# Altium PCB PCB1.PcbDoc
Units mil, origin at the board's own origin, x right, y up, seen from the top; angles counter-clockwise.
Board outline 2700 x 1000 mil, 2 copper layers (Top Layer, Bottom Layer); 64 components, 73 nets, 299 pads, 89 vias.
Unrouted connection lines stored in the file: 30.
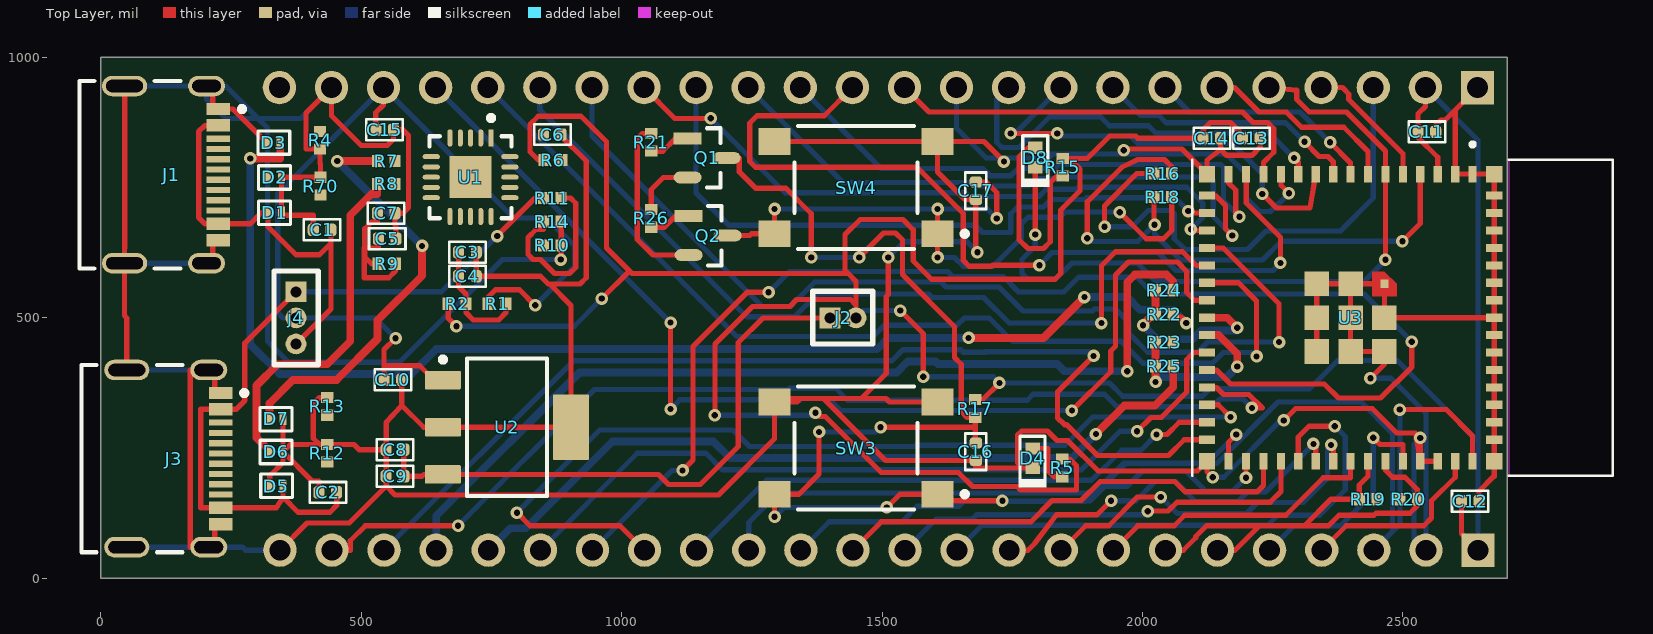
[diagram p0: Top Layer view]
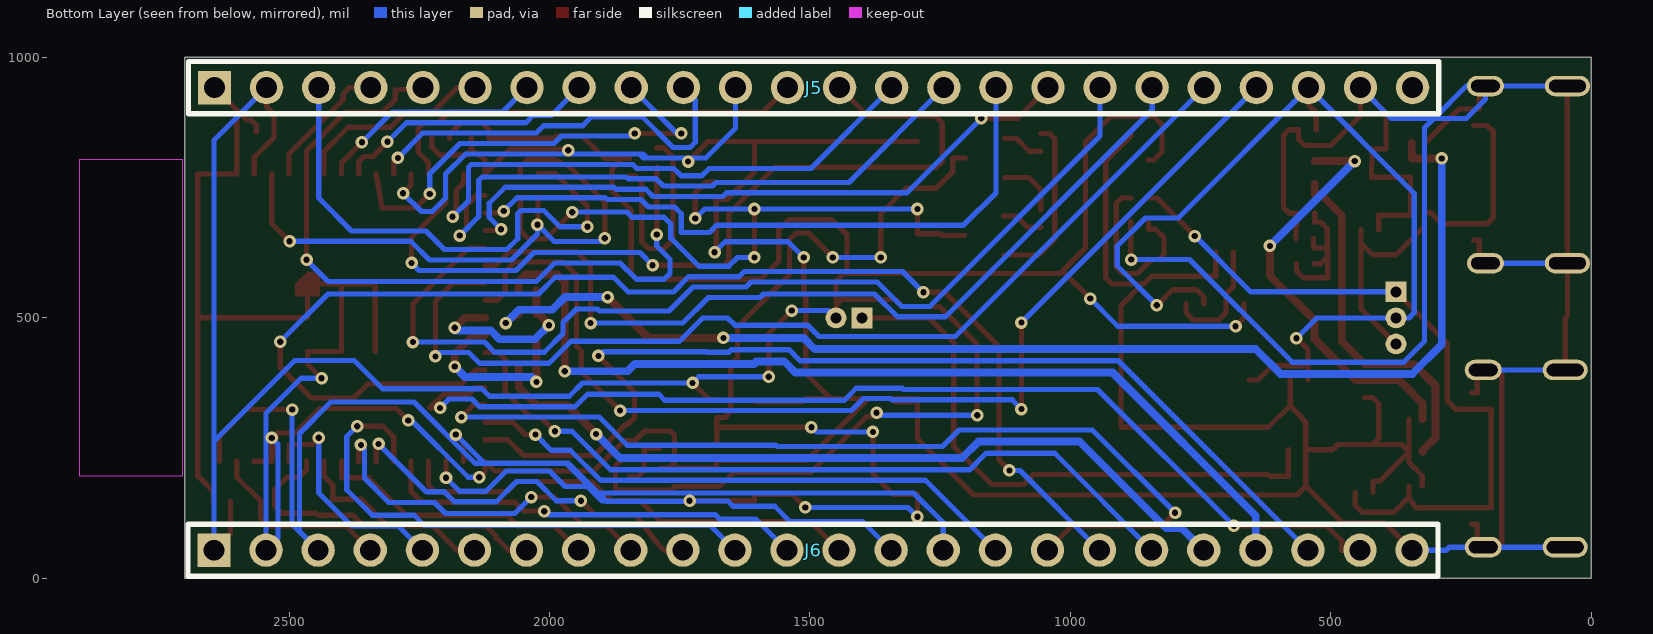
[diagram p1: Bottom Layer view, seen from below]

## Layer stack, top to bottom
Top Solder: solder mask 0.4, Solder Resist, Dk 3.5
Top Layer: signal copper 1.4
Dielectric 1: dielectric 12.6, FR-4, Dk 4.8
Bottom Layer: signal copper 1.4
Bottom Solder: solder mask 0.4, Solder Resist, Dk 3.5

## Board outline
0,1000 2700,1000 2700,0 0,0

## Design rules (kind name [scope] priority, off if disabled: settings)
Clearance [All] p1: gap=10 ignorepadtopadclearanceinfootprint=FALSE except(6: SMDPad-SMDPad)
ComponentClearance R25_23 [InComponent('R25') vs InComponent('R23')] p1: gap=0 collisioncheckmode=3 verticalgap=0 showdistances=FALSE
ComponentClearance R24_22 [InComponent('R24') vs InComponent('R22')] p2: gap=0 collisioncheckmode=3 verticalgap=0 showdistances=FALSE
ComponentClearance R1_2 [InComponent('R1') vs InComponent('R2')] p3: gap=0 collisioncheckmode=3 verticalgap=0 showdistances=FALSE
ComponentClearance [All] p4: gap=10 collisioncheckmode=3 verticalgap=10 showdistances=FALSE
DiffPairsRouting [All] p1: maxlimit=10 minlimit=10 mostfreqgap=10 toplayer_minwidth=15 toplayer_maxwidth=15 toplayer_prefwidth=15 bottomlayer_minwidth=15 bottomlayer_maxwidth=15 bottomlayer_prefwidth=15 maxuncoupledlength=500
PolygonConnect [All] p1: connectstyle=Relief reliefconductorwidth=10 reliefentries=4 polygonreliefangle="90 Angle" airgapwidth=10
RoutingVias [All] p1: holewidth=12 width=24 viastyle="Through Hole" minholewidth=12 minwidth=24 maxholewidth=12 maxwidth=24
SolderMaskExpansion [All] p1: expansion=2 istentingtop=FALSE
Width [All] p1: maxlimit=10 minlimit=10 preferedwidth=10
28 further rules are at their usual default settings.

## Classes and differential pairs
differential pair FTDI_USB: +FTDI_USB_P -FTDI_USB_N
differential pair ESP_USB: +ESP_USB_P -ESP_USB_N
differential pair CON_ESP_USB: +CON_ESP_USB_P -CON_ESP_USB_N
differential pair CON2_USB: +CON2_USB_P -CON2_USB_N
differential pair CON1_USB: +CON1_USB_P -CON1_USB_N

## Components (designator, comment, footprint, x,y, rotation, side; value= is the part's Value field where it differs from the comment)
C1 "100nf , 50V" CAPC1005X55N 425,669 r0 top
C2 "100nf , 50V" CAPC1005X55N 436,165.01 r0 top
C3 "4u7,16V" CAPC1005X55N 704.07,626 r180 top
C4 "100nf , 50V" CAPC1005X55N 703.93,580 r0 top
C5 "100nf , 50V" CAPC1005X55N 550,652 r0 top
C6 "100nf , 50V" CAPC1005X55N 867,852 r0 top
C7 "100nf , 50V" CAPC1005X55N 547.93,701 r0 top
C8 "10uf , 10v" CAPC1005X55N 565,247 r0 top
C9 "10uf , 10v" CAPC1005X55N 565,196 r0 top
C10 "4u7,16V" CAPC1005X55N 561,381 r180 top
C11 "100nf , 50V" CAPC1005X55N 2545.93,857 r180 top
C12 "100nf , 50V" CAPC1005X55N 2629,148 r180 top
C13 "10uf , 10v" CAPC1005X55N 2209,845 r180 top
C14 "100nf , 50V" CAPC1005X55N 2133.07,845 r180 top
C15 "100nf , 50V" CAPC1005X55N 545,861 r180 top
C16 "1uF,35V" CAPC1005X55N 1680,243 r90 top
C17 "100nf , 50V" CAPC1005X55N 1680,744 r90 top
D1 "AQ3045-01ETG" AQ3045-01ETG 334,702 r180 top
D2 "AQ3045-01ETG" AQ3045-01ETG 334,770 r180 top
D3 "AQ3045-01ETG" AQ3045-01ETG 331.8,836 r0 top
D4 "LED_GREEN" "LED_0402_GRN - duplicate" 1789,230.7 r90 top
D5 "AQ3045-01ETG" AQ3045-01ETG 337.2,177 r0 top
D6 "AQ3045-01ETG" AQ3045-01ETG 337,243 r180 top
D7 "AQ3045-01ETG" AQ3045-01ETG 337,306 r180 top
D8 "LED_RED" LED_0402_RED 1794,807.7 r90 top
J1 "217179-0001" FP-2171790001-MFG 91,775 r270 top
J2 "FTS-102-01-F-S" HDR_1X2 1400,500 r90 top locked
J3 "217179-0001" FP-2171790001-MFG 95.28,229.92 r270 top
j4 "612-FTS-103-01-F-S-ND" "HDR_1X3 - duplicate" 375,550 r0 top locked
J5 "0022284245" HDR_1X24_2.54MM 1493,942 r90 bottom
J6 "0022284245" HDR_1X24_2.54MM 1494,54 r90 bottom
Q1 "SS8050-G" PCBComponent_1 1164,812 r0 top
Q2 "SS8050-G" PCBComponent_1 1166,663 r0 top
R1 "0R" RESC1005X37N 761,527 r0 top
R2 "0R" RESC1005X37N 683.99,527 r0 top
R4 "5k1" RESC1005X37N 421,841 r90 top
R5 "1k_R" RESC1005X37N 1846,212 r90 top
R6 "0R" RESC1005X37N 868,803 r0 top
R7 "27R" RESC1005X37N 548,801 r0 top
R8 "27R" RESC1005X37N 548,757 r0 top
R9 "0R" RESC1005X37N 549.01,604 r0 top
R10 "10K" RESC1005X37N 867,639 r180 top
R11 "4k7" RESC1005X37N 867,730 r180 top
R12 "5k1" RESC1005X37N 435,240.01 r270 top
R13 "5k1" RESC1005X37N 435,330.01 r270 top
R14 "10K" RESC1005X37N 867,685 r180 top
R15 "1k_R" RESC1005X37N 1847,789 r90 top
R16 "27R" RESC1005X37N 2039.01,777 r0 top
R17 "10K" RESC1005X37N 1679,326 r90 top
R18 "27R" RESC1005X37N 2039,732 r180 top
R19 "0R" RESC1005X37N 2432.99,152 r180 top
R20 "0R" RESC1005X37N 2511,152 r180 top
R21 "10K" RESC1005X37N 1057,837 r90 top
R22 "0R" RESC1005X37N 2042,507 r180 top
R23 "0R" RESC1005X37N 2042.02,453 r180 top
R24 "0R" RESC1005X37N 2041.99,553 r180 top
R25 "0R" RESC1005X37N 2042.01,407 r180 top
R26 "10K" RESC1005X37N 1057,691 r90 top
R70 "5k1" RESC1005X37N 422,753 r270 top
SW3 "PTS645SH50SMTR92LFS" FP-PTS645SH50SMTR92LFS-MFG 1450,250 r180 top locked
SW4 "PTS645SH50SMTR92LFS" FP-PTS645SH50SMTR92LFS-MFG 1450,750 r180 top locked
U1 "FT231XQ-R" FP-QFN-20-IPC_B 710,770 r270 top locked
U2 "TL1963A-33DCYR" DCY0004A_N 780,290 r0 top locked
U3 "ESP32-S3-MINI-1-N8" XCVR_ESP32-S3-MINI-1-N8 2399.41,500.39 r270 top locked

## Footprints (in the part's own frame and the unit in brackets; to place one, negate y for a bottom-side part, rotate by r counter-clockwise, add the part's x,y. Pads: shape width x height; smd on the part's side, far side on the other; paste and mask are expansions set on the pad)
AQ3045-01ETG [mm]
  rect 0.35x0.6 smd: 1(-0.325,0) 2(0.325,0)
  silkscreen extent -0.76,-0.56 0.79,0.58, body extent -0.54,-0.34 0.54,0.34, height 0.42
CAPC1005X55N [mm]
  rrect53% 0.54x0.6 smd: 1(-0.43,0) 2(0.43,0)
  silkscreen extent -0.89,-0.51 0.89,0.51, body extent -0.5,-0.25 0.5,0.25, height 0.55
DCY0004A_N [mm] "SOT223, 4-Leads, Body 6.7x3.7mm, Pitch 2.3mm, IPC Medium Density"
  rrect11% 1.75x0.9 smd: 1(-3.125,2.3) 2(-3.125,0) 3(-3.125,-2.3)
  rrect6% 1.75x3.2 smd: 4(3.125,0)
  silkscreen extent -3.25,-3.35 1.95,3.42, body extent -3.5,-3.25 3.5,3.25, height 1.62
FP-2171790001-MFG [mm]
  rect 0.6x1.15 smd paste+0 mask+0: A1B12(-3.2,3.425) A4B9(-2.4,3.425) B1A12(3.2,3.425) B4A9(2.4,3.425)
  rect 0.3x1.15 smd paste+0 mask+0: A5(-1.25,3.425) A6(-0.25,3.425) A7(0.25,3.425) A8(1.25,3.425) B5(1.75,3.425) B6(0.75,3.425) B7(-0.75,3.425) B8(-1.75,3.425)
  rrect100% 1x1.8 hole 1.4 slot 0.6 at 0 deg paste-2539.97 mask+0: S1(-4.32,2.85) S2(4.32,2.85)
  rrect100% 1x2.2 hole 1.8 slot 0.6 at 0 deg paste-2539.97 mask+0: S3(-4.32,-1.15) S4(4.32,-1.15)
  silkscreen extent -4.57,-3.35 4.57,4.7, body extent -4.92,-3.45 4.92,4.1, height 0.25
FP-PTS645SH50SMTR92LFS-MFG [mm]
  rect 1.55x1.3 smd paste+0 mask+0: 1(-3.975,2.25) 2(3.975,2.25) 3(-3.975,-2.25) 4(3.975,-2.25)
  silkscreen extent -5.43,-3 3,3, body extent -4.5,-3 4.5,3, height 4.3
FP-QFN-20-IPC_B [mm]
  rect 0.84x0.242 smd paste+0 mask+0: 1(-1.916,1)
  rrect100% 0.84x0.242 smd paste+0 mask+0: 2(-1.916,0.5) 3(-1.916,0) 4(-1.916,-0.5) 5(-1.916,-1) 11(1.916,-1) 12(1.916,-0.5) 13(1.916,0) 14(1.916,0.5) 15(1.916,1)
  rrect100% 0.242x0.84 smd paste+0 mask+0: 6(-1,-1.916) 7(-0.5,-1.916) 8(0,-1.916) 9(0.5,-1.916) 10(1,-1.916) 16(1,1.916) 17(0.5,1.916) 18(0,1.916) 19(-0.5,1.916) 20(-1,1.916)
  rect 2.05x2.05 smd paste-1000 mask+0: 21(0,0)
  silkscreen extent -3.01,-2 2,2, body extent -2.59,-2.59 2.59,2.59, height 0.25
HDR_1X2 [mil]
  rect 40x40 hole 21: 1(0,0)
  round 40 hole 21: 2(0,-50)
  silkscreen extent -50,-82 51,33, body extent -43,-74 42,26, height 154
"HDR_1X3 - duplicate" [mil]
  rect 40x40 hole 21: 1(0,0)
  round 40 hole 21: 2(0,-50) 3(0,-100)
  silkscreen extent -42,-140 42,40, body extent -42,-125 42,25, height 154
HDR_1X24_2.54MM [mil]
  rect 64x64 hole 40: 1(0,1150)
  round 64 hole 40: 2(0,1050) 3(0,950) 4(0,850) 5(0,750) 6(0,650) 7(0,550) 8(0,450) 9(0,350) 10(0,250) 11(0,150) 12(0,50) 13(0,-50) 14(0,-150) 15(0,-250) 16(0,-350) 17(0,-450) 18(0,-550) 19(0,-650) 20(0,-750) 21(0,-850) 22(0,-950) 23(0,-1050) 24(0,-1150)
  silkscreen extent -50,-1200 50,1200, body extent -47,-1205 51,1195, height 376
"LED_0402_GRN - duplicate" [mm]
  rect 0.6x0.7 smd: 1(-0.475,0) 2(0.475,0)
  silkscreen extent -1.42,-0.69 1.07,0.69, body extent -0.5,-0.3 0.5,0.3, height 0.2
LED_0402_RED [mm]
  rect 0.6x0.7 smd: 1(-0.475,0) 2(0.475,0)
  silkscreen extent -1.42,-0.69 1.07,0.69, body extent -0.5,-0.3 0.5,0.3, height 0.2
PCBComponent_1 [mil]
  rect 53.43x22.52 smd paste+0 mask+0: 1(-37.42,32.4)
  rrect100% 53.43x22.52 smd paste+0 mask+0: 2(-37.42,-42.4) 3(37.42,-5)
  silkscreen extent 0,-62 26,52, body extent -74,-72 74,62, height 10
RESC1005X37N [mm]
  rect 0.54x0.6 smd: 1(-0.432,0) 2(0.432,0)
  body extent -0.5,-0.25 0.5,0.25, height 0.37
XCVR_ESP32-S3-MINI-1-N8 [mm]
  rect 0.8x0.4 smd: 1(-7,5.95) 2(-7,5.1) 3(-7,4.25) 4(-7,3.4) 5(-7,2.55) 6(-7,1.7) 7(-7,0.85) 8(-7,0) 9(-7,-0.85) 10(-7,-1.7) 11(-7,-2.55) 12(-7,-3.4) 13(-7,-4.25) 14(-7,-5.1) 15(-7,-5.95) 31(7,-5.95) 32(7,-5.1) 33(7,-4.25) 34(7,-3.4) 35(7,-2.55) 36(7,-1.7) 37(7,-0.85) 38(7,0) 39(7,0.85) 40(7,1.7) 41(7,2.55) 42(7,3.4) 43(7,4.25) 44(7,5.1) 45(7,5.95)
  rect 0.4x0.8 smd: 16(-5.95,-7) 17(-5.1,-7) 18(-4.25,-7) 19(-3.4,-7) 20(-2.55,-7) 21(-1.7,-7) 22(-0.85,-7) 23(0,-7) 24(0.85,-7) 25(1.7,-7) 26(2.55,-7) 27(3.4,-7) 28(4.25,-7) 29(5.1,-7) 30(5.95,-7) 46(5.95,7) 47(5.1,7) 48(4.25,7) 49(3.4,7) 50(2.55,7) 51(1.7,7) 52(0.85,7) 53(0,7) 54(-0.85,7) 55(-1.7,7) 56(-2.55,7) 57(-3.4,7) 58(-4.25,7) 59(-5.1,7) 60(-5.95,7)
  rect 0.4x0.4 smd paste-1 mask+0: 61(-1.65,1.65)
  rect 0.8x0.8 smd: 62(-7,7) 63(-7,-7) 64(7,-7) 65(7,7)
  rect 1.2x1.2 smd: 66(0,1.65) 67(1.65,1.65) 68(-1.65,0) 69(0,0) 70(1.65,0) 71(-1.65,-1.65) 72(0,-1.65) 73(1.65,-1.65)
  Top Layer region: -1.05,1.05 -2.25,1.05 -2.25,1.65 -1.65,2.25 -1.05,2.25
  Keep-Out Layer region: 7.7,7.725 -7.7,7.725 -7.7,12.775 7.7,12.775
  Keep-Out Layer region: 7.7,7.725 -7.7,7.725 -7.7,12.775 7.7,12.775
  silkscreen extent -8.55,-7.72 7.7,12.77, body extent -7.7,-7.73 7.7,12.78, height 2.55

## Part data
C1 C2 C4 C5 C6 C7 C11 C12 C14 C15 C17: library part CL05B104KB5NNNC, "Ceramic Capacitor, Multilayer, Ceramic, 50V, 10% +Tol, 10% -Tol, X7R, 15% TC, 0.1uF, Surface Mount, 0402"
C3 C10: library part CL05A475MO5NUNC, "Multilayer Ceramic Capacitor, 4.7 uF, 16 V, ± 20%, X5R, 0402 [1005 Metric]"
C8 C9 C13: library part CL05A106MP8NUB8, "Multilayer Ceramic Capacitor, 10 uF, 10 V, ± 20%, X5R, 0402 [1005 Metric]"
C16: library part CL05A105KL5NRNC, "Ceramic Capacitor, Multilayer, Ceramic, 35V, 10% +Tol, 10% -Tol, X5R, 15% TC, 1uF, Surface Mount, 0402"
D1 D2 D3 D5 D6 D7: "TVS DIODE 12VC 3A SOD882 / ESD Suppressor TVS Bi-Dir 5.3V Automotive 2-Pin SOD-882 T/R"
D4: library part VLMG1500-GS08, "LED Uni-Color Yellow Green 574nm 2-Pin Chip 0402(1006Metric) T/R"
D8: library part VLMS1500-GS08, "LED Uni-Color Super Red 639nm 2-Pin Chip 0402(1006Metric) T/R"
J1 J3: "USB Connector, 16 Contact(s), Female, Right Angle, Surface Mount Terminal, Locking, Receptacle"
J2: "Conn Unshrouded Header HDR 2 POS 1.27mm Solder ST Top Entry Thru-Hole Layer"
j4: library part FTS-103-01-F-S, "Conn Unshrouded Header HDR 3 POS 1.27mm Solder ST Thru-Hole"
J5 J6: "Conn Unshrouded Header HDR 24 POS 2.54mm Solder ST Top Entry Thru-Hole KK® Bag"
Q1 Q2: "Trans Gp Bjt NPN 25V 1.5A 300MW 3-PIN SOT-23 T/r"
R1 R2 R6 R9 R19 R20 R22 R23 R24 R25: library part RC0402J000CS, "RC Series 0402 0 Ohms 0.03 W Jumper Surface Mount Thick Film Chip Resistor"
R4 R12 R13 R70: library part AC0402FR-075K1L, "SMD Chip Resistor, 5.1 kOhm, ± 1%, 63 mW, 0402 [1005 Metric], Thick Film, General Purpose"
R5 R15: library part RCS1005F102CS, "Res Thick Film 0402 1K Ohm 1% 1/16W ±100ppm/°C Molded SMD Punched Paper T/R"
R7 R8 R16 R18: library part RC0402FR-0727RL, "SMD Chip Resistor, 27 Ohm, ï¿½ 1%, 62.5 mW, 0402 [1005 Metric], Thick Film, General Purpose"
R10 R14 R17 R21 R26: library part AC0402FR-0710KL, "SMD Chip Resistor, 10 kOhm, ï¿½ 1%, 62.5 mW, 0402 [1005 Metric], Thick Film, General Purpose"
R11: library part RC0402FR-074K7L, "SMD Chip Resistor, 4.7 kOhm, ï¿½ 1%, 62.5 mW, 0402 [1005 Metric], Thick Film, General Purpose"
SW3 SW4: "Switch Tactile N.O. SPST Round Button Gull Wing 0.05A 12VDC 100000Cycles 1.96N SMD T/R"
U1: "USB to Full Handshake UART Interface QFN20 Reel (not offered in your region)"
U2: "LDO Regulator Pos 3.3V 1.5A 4-Pin(3+Tab) SOT-223 T/R"
U3: "SMD module, ESP32-S3FN8, 8 MB SPI flash, PCB antenna"

## Via types
v1: diameter 24, hole 12, Top Layer to Bottom Layer, 89 vias

## Nets (pads, with @x,y where several pads share a name; then routed paths per layer and width w, separated by ;. In a path a pad name is that pad's centre, name@x,y a point inside that pad or via, vN(x,y) a via of type N, cw(c..) or ccw(c..) an arc to the next point about the centre after c; other vN are vias at no path point)
+3V3: C11.2 C12.2 C13.2 C14.2 J2.2 J5.2 J6.1 R2.1 R5.2 R6.1 R15.2 R17.2 U3.3 | length 6680.1
  Top Layer w10: R2.1 666.98,500 v1(682.98,484) ; R6.1 840,803 824,819 824,871 840,887 922,887 971,838 971,634 1015,590 ; v1(962,537) 1015,590 ; v1(1179,313) 1179,450 1251,522 1323,522 1336,535 1440,535 1450,525 ; v1(1372,318) 1379.35,310.65 1390.79,310.65 1498.44,203 1646.36,203 1673.36,176 1759.39,176 1766.03,169.36 1873,169.36 1873,216 1859.99,229.01 R5.2 ; J2.2 1450,525 ; v1(1535,514) 1579,470 v1(1579,387) ; R17.2 1693.33,343.01 v1(1725.32,375) ; R15.2 1860,806.01 ; C13.2 2192.07,851.81 2168.88,875 2130,875 2116.14,861.14 C14.2 1991,845 1987,849 1937,849 1894.01,806.01 1860,806.01 ; J5.2 2543,906 2529,892 C11.2 2529,846 2566.73,808.27 U3.3 ; C12.2 2612.07,85.93 J6.1 ; 1015,590 1020,585 1435,585 ; 1435,585 1450,570 1450,525 ; 1435,585 1429,591 1429,660 1458,689 1540,689 1560,669 1560,609 1595,574 1832,574 1843,585 1843,707.01 1880,744.01 1880,786.01 1860,806.01
  Bottom Layer w10: v1(682.98,484) 909,484 v1(962,537) ; v1(1179,313) 1367,313 v1(1372,318) ; J2.2 1464,514 v1(1535,514) ; v1(1579,387) 1713.32,387 v1(1725.32,375) 1936.42,375 1961.92,349.49 2114.99,349.49 2129.49,364 2320.68,364 2374.68,418 2489,418 2644,263 ; J5.2 2644,841 2644,263 ; J6.1 2644,263
+3V3_FTDI: C6.1 C7.1 R6.2 R9.1 U1.10 U1.20 | length 130.8
  Top Layer w10: C7.1 531,684 520,684 507,671 507,617 520,604 R9.1
+3V3_REG: C8.2 C9.2 J2.1 U2.3 | length 1128.2
  Top Layer w10: C8.2 C9.2 617,196 620.45,199.45 U2.3 1070.55,199.45 1090,180 1151,180 1224,253 1224,452.84 1271.16,500 J2.1
+5: C10.2 C15.2 j4.2 J5.22 R1.1 U2.1 | length 1822.6
  Top Layer w10: C15.2 528.07,894 543,908.93 J5.22 ; C10.2 544.07,408 ; v1(566,461) 544.07,439.07 544.07,408 ; U2.1 640,380.55 612.55,408 544.07,408 ; R1.1 743.99,540 757.99,554 804,554 v1(834,524)
  Bottom Layer w10: v1(566,461) 527,500 j4.2 350,500 340,510 340,739 J5.22 793,692 856,692 910,638 910,600 v1(834,524)
"+5V VBUS1": C2.2 D5.2 J3.A4B9 J3.B4A9 j4.1 R11.2 | length 1415.5
  Top Layer w10: D5.2 350,156 ; j4.1 276.7,451.7 276.7,341.11 260,324.41 J3.A4B9 192,324.41 192,135.43 J3.B4A9 337,135.43 350,156 ; C2.2 452.93,139.93 440,127 379,127 350,156 ; v1(761,657) 834,730 R11.2
  Bottom Layer w10: j4.1 654,550 v1(761,657)
"+5V VBUS2": C1.2 D1.2 J1.A4B9 J1.B4A9 j4.3 | length 780.7
  Top Layer w10: J1.A4B9 200,869.49 188,857.49 188,692.51 200,680.51 J1.B4A9 287,680.51 308.49,702 D1.2 321.2,675 375,621.2 420,621.2 441.93,643.13 ; j4.3 441.93,516.93 441.93,643.13 ; C1.2 441.93,643.13
+VCC_FTDI: C3.2 C4.1 R1.2 R2.2 U1.12 | length 227.5
  Top Layer w10: C3.2 687.14,602.14 687,602 C4.1 687,560 701,546 R2.2 701,510 715,496 764.01,496 778.01,510 R1.2
"BTN GPIO0": C17.2 Q2.3 R18.1 SW4.1 SW4.2 | length 1371.4
  Top Layer w10: Q2.3 1246,658 1249.42,661.42 SW4.2 v1(1293.5,709) ; v1(1606.5,616) SW4.1 v1(1606.5,709) ; C17.2 1700,760.93 1720,740.93 v1(1720,691) ; v1(1956.08,703) 2007.08,652 2040,652 2056.01,668.01 R18.1
  Bottom Layer w10: v1(1293.5,709) v1(1606.5,709) 1702,709 v1(1720,691) ; v1(1606.5,616) 1639,616 1656,599 1713,599 1767,653 1767,680 1780,693 1841.25,693 1851.25,703 v1(1956.08,703)
CHIP_PU: C16.2 J6.3 Q1.3 R17.1 SW3.1 SW3.2 U3.45 | length 3503.6
  Top Layer w10: Q1.3 1226,807 1226,780 1257,749 1315,749 1364,700 v1(1364,616) ; v1(1293.5,118) SW3.2 1340.42,161.42 1379,200 v1(1379,281) ; v1(1456,616) 1503,663 1526,663 1539,650 1539,583 1639,483 1639,424 1652.01,410.99 1652.01,320 1663.02,308.99 R17.1 1679,290 ; v1(1497,290) 1679,290 ; v1(1509,136) 1534.42,161.42 SW3.1 1606.5,149 v1(1731,149) ; C16.2 1679,259.93 1679,290 ; v1(2494,324) 2583,324 2633.66,273.34 U3.45
  Bottom Layer w10: v1(1293.5,118) 1311.5,136 v1(1509,136) ; v1(1364,616) v1(1456,616) ; v1(1379,281) 1488,281 v1(1497,290) ; v1(1731,149) 1732,148 1890.29,148 1963.34,221.06 2142.8,221.06 2260,338.26 2419.74,338.26 2480,278 2480,90 ; J6.3 2480,90 ; v1(2494,324) 2494,104 2480,90
CON1_USB_N: D7.2 J3.A7 J3.B7 R7.1 | length 809.9
  Top Layer w15: D7.2 324.2,336 369.2,381 453,381 531.31,459.31 531.31,495.47 617,581.15 v1(617,638) ; v1(454,801) R7.1
  Bottom Layer w15: v1(454,801) v1(617,638)
CON1_USB_P: D6.2 J3.A6 J3.B6 R8.1 | length 682.5
  Top Layer w15: D6.2 324.2,245 299.2,270 299.2,370.2 340,411 435,411 479,455 479,697 520,738 530.99,738 R8.1
CON2_USB_N: D3.2 J1.A7 J1.B7 R22.1 | length 2377.3
  Top Layer w15: v1(287,806) 344.59,806 D3.2 ; v1(1666,461.5) 1809.9,461.5 v1(1888.44,540.04) ; R22.1 2077.23,496.77 v1(2084,490)
  Bottom Layer w15: v1(287,806) 287,449 343.5,392.5 596.5,392.5 644,440 1490.46,440 1511.96,461.5 v1(1666,461.5) ; v1(1888.44,540.04) 1970.21,540.04 1994.76,515.5 2058.5,515.5 v1(2084,490)
CON2_USB_P: D2.2 J1.A6 J1.B6 R23.1
"CON GPIO0": J5.3 R16.1 | length 1001.7
  Top Layer w10: v1(1927,675) 1927,715 1989,777 R16.1
  Bottom Layer w10: v1(1927,675) 1980,675 2011,706 2055,706 2061,700 2061,652 2082,631 2201.29,631 2237.29,667 2380,667 2443,730 J5.3
CON_ESP_USB_N: J6.21 R24.1 | length 1811
  Top Layer w15: v1(1970.5,397.5) 1970.5,568.5 1985,583 2046,583 2059,570 R24.1
  Bottom Layer w15: J6.21 644,119.86 919.14,395 1528,395 1549.5,416.5 1602.5,416.5 1607.5,411.5 1836.06,411.5 1850.06,397.5 v1(1970.5,397.5)
CON_ESP_USB_P: J6.20 R25.1 | length 1510.9
  Top Layer w15: v1(1910.5,277) 1965,331.5 2023.39,331.5 2059.02,367.12 R25.1
  Bottom Layer w15: J6.20 786.09,96.09 815.91,96.09 982.32,262.5 1176.5,262.5 1208.25,230.75 1864.25,230.75 v1(1910.5,277)
DTR_FTDI: Q2.2 R21.2 U1.18 | length 335.6
  Top Layer w10: R21.2 1040,854.01 1030,844.01 1030,650.6 1060,620.6 Q2.2
ESP_USB_N: R22.2 R24.2 U3.23 | length 350.3
  Top Layer w15: v1(2001,486) 2001,488 2020,507 R22.2 2024.99,529 R24.2 ; U3.23 2162.61,500.39 v1(2182,481)
  Bottom Layer w15: v1(2001,486) 2028,459 2096,459 2113,476 2182,476 v1(2182,481)
ESP_USB_P: R23.2 R25.2 U3.24 | length 342.8
  Top Layer w15: v1(2025,376.98) R25.2 2025,429 R23.2 ; U3.24 2146,466.93 2182,430.93 v1(2182,406.5)
  Bottom Layer w15: v1(2025,376.98) 2034.52,386.5 2162,386.5 v1(2182,406.5)
FTDI_USB_N: R7.2 U1.9
FTDI_USB_P: R8.2 U1.8
GND: C1.1 C2.1 C3.1 C4.2 C5.2 C6.2 C7.2 C8.1 C9.1 C10.1 C11.1 C12.1 C13.1 C14.1 C15.1 C16.1 C17.1 D1.1 D2.1 D3.1 D4.1 D5.1 D6.1 D7.1 J1.A1B12 J1.B1A12 J1.S1 J1.S2 J1.S3 J1.S4 J3.A1B12 J3.B1A12 J3.S1 J3.S2 J3.S3 J3.S4 J5.1 J5.23 J6.2 J6.24 R4.1 R10.1 R12.1 R13.1 R14.1 R70.1 SW3.3 SW3.4 SW4.3 SW4.4 U1.3 U1.13 U1.21 U2.2 U2.4 U3.1 U3.2 U3.42 U3.43 U3.46 U3.47 U3.48 U3.49 U3.50 U3.51 U3.52 U3.53 U3.54 U3.55 U3.56 U3.57 U3.58 U3.59 U3.60 U3.61 U3.62 U3.63 U3.64 U3.65 U3.66 U3.67 U3.68 U3.69 U3.70 U3.71 U3.72 U3.73 | length 13884.4
  Top Layer w10: J1.S3 46,945.08 46,634 45.72,633.72 J1.S4 45.72,504.28 50,500 J3.S3 ; J1.S2 215,604.92 215,649.02 J1.B1A12 ; J1.S1 215,945.08 215,900.98 J1.A1B12 254.02,900.98 D3.1 ; J3.B1A12 219,103.94 219,59.84 J3.S2 172,59.84 172,400 J3.S1 219,400 219,355.91 J3.A1B12 ; D5.1 324.41,197 349.8,222.39 D6.1 ; J6.24 396,106 477,106 548.07,177.07 ; D7.1 D6.1 ; C1.1 408.07,697 346.8,697 D1.1 D2.1 384,770 R70.1 422,796 421,797 R4.1 394,823.99 394,893 J5.23 443,888 500,831 550,831 561.93,842.93 C15.1 580,861 591,850 591,712 580,701 C7.2 564.86,677.07 566.93,675 C5.2 ; C2.1 419.07,187 405.8,187 D6.1 ; R13.1 420,347.02 408,335.02 408,269.02 420,257.02 ; C10.1 577.93,332.07 ; C3.1 721,612 720.86,611.86 C4.2 844,580 859,565 862,565 ; v1(883,612) 884.01,613.01 R10.1 R14.1 ; C6.2 883.93,849.07 932,801 932,577 920,565 862,565 ; SW4.4 SW4.3 ; v1(1512,616) 1512,545 1508,541 1508,393 1460,345 ; SW3.3 1514,338.58 1507.58,345 1460,345 ; v1(1683,626) 1680,629 C17.1 1659.43,727.07 1606.5,780 SW4.3 ; v1(1734,800) 1695.42,838.58 SW4.3 ; D4.1 1770,212 ; v1(1964,822) 1966,824 2075.8,824 U3.63 2123.82,802.82 2150,823.18 ; v1(2135,194) 2123.82,205.18 U3.64 2105.01,206 1915,206 1856.24,264.76 1835.65,264.76 1817.42,283 1768,283 1760,275 1760,222 1770,212 ; C14.1 2150,823.18 ; C13.1 2225.93,827.93 2210,812 2161.18,812 2150,823.18 ; v1(2271,303) 2294,326 2441,326 2488,279 2523.73,279 2525.65,268.12 U3.42 ; U3.73 U3.72 U3.71 U3.68 ; v1(2437.41,383.94) 2464.37,410.89 U3.67 U3.70 U3.69 U3.68 ; v1(2533.27,269.46) U3.42 ; C11.1 2562.86,870 2572.86,880 2581,880 2600.2,899.2 ; U3.43 U3.42 ; J5.1 2600.2,899.2 ; C12.1 2645.93,167.06 2675,196.13 U3.65 U3.46 U3.47 U3.48 U3.49 U3.50 U3.51 U3.52 U3.53 ; D6.1 363.81,257.02 420,257.02 ; 420,257.02 R12.1 486,257.02 496.02,247 C8.1 ; 548.07,177.07 548.07,176.93 565,160 1185.71,160 1293.5,267.79 SW3.4 ; 548.07,177.07 C9.1 548.07,221 C8.1 ; C8.1 548.07,299 577.93,332.07 ; 577.93,332.07 620,290 U2.2 U2.4 903.03,523.97 862,565 ; SW3.4 1336.49,338.58 1342.91,345 ; SW3.4 1293.5,345 1342.91,345 ; 1342.91,345 1387.53,345 ; 1387.53,345 1506.46,226.07 C16.1 1680,212 1770,212 ; 1387.53,345 1460,345 ; U3.68 U3.61 U3.66 U3.53 ; 2600.2,899.2 U3.2 U3.1 U3.62 U3.60 U3.59 U3.58 U3.57 U3.56 U3.55 U3.54 U3.53
  Bottom Layer w10: J1.S4 J1.S2 ; J1.S3 J1.S1 ; J3.S4 J3.S2 272,59.84 277.84,54 J6.24 ; J3.S3 J3.S1 ; J5.23 384,883 302.08,883 ; v1(883,612) 771,612 574,415 360,415 320,455 320,865.08 302.08,883 ; v1(1512,616) 1542,646 1663,646 v1(1683,626) ; v1(1734,800) 1741,807 1820,807 1827.67,814.67 1956.67,814.67 v1(1964,822) ; v1(2135,194) 2156,194 2265,303 v1(2271,303) ; v1(2437.41,383.94) 2477.06,383.94 2544,317 J6.2 2521,77 2521,257.2 v1(2533.27,269.46) ; J1.S1 203.2,919.8 240,883 302.08,883 ; J1.S1 240,945.08 302.08,883
GPIO0: R16.2 R18.2 U3.4 | length 1152.6
  Top Layer w10: v1(1894,653) 1894,722.72 1960.31,789.03 1991,804 2042.02,804 2056.02,790 R16.2 ; R18.2 2021.99,680.01 v1(2023,679) ; v1(2499,647) 2533.27,681.27 U3.4
  Bottom Layer w10: v1(1894,653) 1900.24,646.76 1990.76,646.76 v1(2023,679) 2023,661 2073,611 2230.33,611 2266.33,647 v1(2499,647)
GPIO1: J5.4 U3.5 | length 255
  Top Layer w10: J5.4 2384,942 2396,930 2396,919 2499.8,815.2 U3.5
GPIO2: D8.1 J5.5 U3.6 | length 1453.1
  Top Layer w10: v1(1794,660) D8.1 ; J5.5 2296,937 2296,919 2320,895 2391.71,895 2466.34,820.38 U3.6 v1(2466.34,611.34)
  Bottom Layer w10: v1(1794,660) 1794,638 1768.56,612.56 1768.56,585.44 1780,574 1832.79,574 1864.29,605.5 1989.75,605.5 2025.4,569.86 2424.86,569.86 v1(2466.34,611.34)
GPIO3: J5.6 U3.7 | length 384.1
  Top Layer w10: J5.6 2176.53,942 2223.53,895 2276,895 2305.04,865.96 2386.44,865.96 2432.87,819.53 U3.7
GPIO4: J5.7 U3.8 | length 437.8
  Top Layer w10: v1(2360,837) 2399.41,797.59 U3.8
  Bottom Layer w10: J5.7 2090,895 2302,895 v1(2360,837)
GPIO5: J5.8 U3.9 | length 505.8
  Top Layer w10: v1(2311,838) 2339,810 2355.94,810 2365.94,800 U3.9
  Bottom Layer w10: J5.8 1996,889 2031,889 2045.33,874.67 2274.33,874.67 v1(2311,838)
GPIO6: J5.9 U3.10 | length 854.4
  Top Layer w10: v1(1747,854) v1(1836.1,854) ; v1(2230,738) 2257,711 2321.35,711 U3.10
  Bottom Layer w10: v1(1747,854) 1755,854 J5.9 ; v1(1836.1,854) 1841.1,849 1976.67,849 1991,834.67 2171.69,834.67 2230,776.36 v1(2230,738)
GPIO7: J5.10 U3.11 | length 781.2
  Top Layer w10: v1(2291,807) 2299.02,798.98 U3.11
  Bottom Layer w10: J5.10 1720,919 1720,837 1730,827 1763,827 1822,886 1919,886 1936,869 2011,869 2025.33,854.67 2243.33,854.67 v1(2291,807)
GPIO8: J5.11 U3.12 | length 873.7
  Top Layer w10: U3.12 2265.55,754.45 v1(2281,739)
  Bottom Layer w10: J5.11 1643,864 1700,807 1812.5,807 1820.17,814.67 2160.63,814.67 2199.36,775.94 2199.36,729.64 2225.03,703.97 2245.97,703.97 v1(2281,739)
GPIO9: J5.12 U3.13 | length 837
  Top Layer w10: J5.12 1590,895 2192,895 2212,875 2240,875 2252,863 2252,817.91 2232.09,798 U3.13
GPIO10: J5.13 U3.14 | length 1683.1
  Top Layer w10: J5.13 1389,888 1260,888 1246,874 1246,800 1257,789 1567,789 1656,700 1656,610 1667,599 1710,599 1712,601 v1(1802,601) ; U3.14 2198.62,765.24 2199,764.86 2199,720.62 2264.78,654.84 v1(2264.78,605.44)
  Bottom Layer w10: v1(1802,601) 1826.5,625.5 2029.52,625.5 2064.02,591 2250.33,591 v1(2264.78,605.44)
GPIO11: J5.14 U3.15 | length 1092.2
  Top Layer w10: U3.15 2165.16,759.08 2179,745.24 2179,701 v1(2186,694)
  Bottom Layer w10: J5.14 1498,787 1693.25,787 1707.25,773 1747.25,773 1761.25,787 1832.5,787 1840.17,794.67 2150.01,794.67 2155.64,789.03 2155.64,724.36 v1(2186,694)
GPIO12: J5.15 U3.16 | length 1208.2
  Top Layer w10: U3.16 2140,734.65 2159,715.65 2159,671 v1(2172,658)
  Bottom Layer w10: J5.15 1425,760 1680.25,760 1687.25,753 1781.25,753 1795.25,767 1848.84,767 1852.5,770.66 2129.01,770.66 2135.64,764.03 2135.64,694.36 v1(2172,658)
GPIO13: J5.16 U3.17 | length 1275.2
  Top Layer w10: v1(2088,705) 2091.82,701.18 U3.17
  Bottom Layer w10: J5.16 1143,740 1205,678 1679,678 1693,664 1747,664 1747,700 1760,713 1810,713 1824,727 1888.84,727 1892.5,730.66 2062.34,730.66 v1(2088,705)
GPIO14: J5.17 U3.18 | length 1270.4
  Top Layer w10: J5.17 1102,883 v1(1171,883) ; v1(2093,670) 2095.28,667.72 U3.18
  Bottom Layer w10: v1(1171,883) 1314,740 1660.25,740 1667.25,733 1801.25,733 1815.25,747 1872.5,747 1876.16,750.66 2084.98,750.66 2115.64,720 2115.64,692.64 v1(2093,670)
GPIO15: J5.18 U3.19 | length 1902.8
  Top Layer w10: U3.19 2155,634.25 2262,527.25 v1(2262,453.5)
  Bottom Layer w10: J5.18 943,849 1270,522 1323.71,522 1370.71,569 1612.86,569 1622.86,559 1724.71,559 1770.71,513 1904,513 1908,517 1948,517 1974,491 1974,470 2010,434 2105.32,434 2124.82,453.5 v1(2262,453.5)
GPIO16: J5.19 U3.20 | length 1661.6
  Top Layer w10: v1(1921,490) 1921,600 1948,627 2077,627 2103.21,600.79 U3.20
  Bottom Layer w10: J5.19 843,899 1240,502 1332,502 1375.86,545.86 1589.14,545.86 1596,539 1695,539 1744,490 v1(1921,490)
GPIO17: J5.20 U3.21 | length 1952.5
  Top Layer w10: U3.21 2184,567.32 2219,532.32 v1(2219,426)
  Bottom Layer w10: J5.20 1220.92,464.08 1482.72,464.08 1504.64,486 1644,486 1658,500 1705.71,500 1750.6,455.12 1958.81,455.12 2000.93,413 2134.5,413 2155,433.5 2211.5,433.5 v1(2219,426)
GPIO18: J5.21 U3.22 | length 2126.6
  Top Layer w10: v1(1094,325) v1(1094,491) ; v1(1864.42,322) 1938.98,396.56 1938.98,436.56 1948,445.58 1948,582 1973,607 2067,607 2085,589 2085,548.86 2100,533.86 U3.22
  Bottom Layer w10: J5.21 v1(1094,491) ; v1(1094,325) 1111.62,342.62 1343,342.62 1345.38,345 1396.91,345 1419.91,322 v1(1864.42,322)
GPIO21: J6.19 U3.25 | length 1499.6
  Top Layer w10: v1(1989.49,282.49) 2016,309 2036,309 2085,358 2085,420 2098.46,433.46 U3.25
  Bottom Layer w10: J6.19 1030,240 1162,240 1193.75,208.25 1882.25,208.25 1956.49,282.49 v1(1989.49,282.49)
GPIO26: J6.18 U3.26 | length 2489.9
  Top Layer w10: v1(1117,207) 1137.13,227.13 1137.13,445.13 1241,549 v1(1282,549) ; U3.26 2142,400 2169,373 2349,373 2376,346 2457,346 2517,406 v1(2517,454)
  Bottom Layer w10: J6.18 1097,207 v1(1117,207) ; v1(1282,549) 1322,589 1626,589 1636,579 1733,579 1762.14,549.86 1848.86,549.86 1877,578 1988.91,578 2020.91,546 2425,546 v1(2517,454)
GPIO33: J6.17 U3.28 | length 1802.1
  Top Layer w10: v1(799,126.13) 824.13,101 997,101 J6.17 ; U3.28 2145.42,333.07 v1(2169,309.49)
  Bottom Layer w10: v1(799,126.13) 957.87,285 1214,285 1245.75,253.25 1562.7,253.25 1565.08,255.63 1850.63,255.63 1904.49,309.49 v1(2169,309.49)
GPIO34: J6.16 U3.29 | length 1081.6
  Top Layer w10: v1(2027,276) 2047,276 2070.61,299.61 U3.29
  Bottom Layer w10: J6.16 1278.25,188.25 1902.25,188.25 1960,246 1997,246 v1(2027,276)
GPIO35: J6.15 U3.31 | length 1116.3
  Top Layer w10: U3.31 2165.16,261.16 v1(2180,276)
  Bottom Layer w10: J6.15 1244,107 1301,164 1911,164 1968,221 2125,221 v1(2180,276)
GPIO36: J6.14 U3.32 | length 976.3
  Top Layer w10: v1(2198.62,193) U3.32
  Bottom Layer w10: J6.14 1398.6,108.6 1538.02,108.6 1567.67,138.25 1647.67,138.25 1657.67,148.25 1898.95,148.25 1926.7,176 1970,176 2000,206 2083,206 2122,167 2172.62,167 v1(2198.62,193)
GPIO37: J6.13 U3.33 | length 902.8
  Top Layer w10: J6.13 1498.6,108.6 1785.6,108.6 1826.36,149.36 1882.17,149.36 1918.81,186 2062,186 2082,166 2220,166 2232.09,178.09 U3.33
GPIO38: J6.12 U3.34 | length 826.4
  Top Layer w10: v1(2010,129) 2049.03,129 2066.03,146 2245,146 2265.55,166.55 U3.34
  Bottom Layer w10: J6.12 1603.99,113.99 1673.41,113.99 1681.42,122 2003,122 v1(2010,129)
GPIO39: J6.11 U3.35 | length 1048.4
  Top Layer w10: U3.35 2299.02,271.15 2320,292.13 v1(2368.87,292.13)
  Bottom Layer w10: J6.11 1692,102 2240.42,102 2259.42,121 2340,121 2389,170 2389,272 v1(2368.87,292.13)
GPIO40: J6.10 U3.36 | length 740.3
  Top Layer w10: J6.10 1780,54 1793,67 1835,122 1912.7,122 v1(1939.7,149) ; v1(2328,258) 2332.48,253.52 U3.36
  Bottom Layer w10: v1(1939.7,149) 1987,149 2024,186 2063.01,186 2102.01,147 2182.28,147 2201.28,166 2236,166 v1(2328,258)
GPIO41: J6.9 U3.37 | length 694
  Top Layer w10: J6.9 1891,101 1935,101 1990,156 v1(2035,156) ; v1(2362,256) 2365.94,252.06 U3.37
  Bottom Layer w10: v1(2035,156) 2066.6,124.4 2199.69,124.4 2220.78,145.49 2308.41,145.49 2355.33,192.41 2355.33,249.33 v1(2362,256)
GPIO42: J6.8 U3.38 | length 544.8
  Top Layer w10: J6.8 1991,101 2061.03,101 2081.03,121 2275,121 2347,193 2399.41,193 U3.38
GPIO45: J6.5 U3.41 | length 444.9
  Top Layer w10: v1(2443,270) 2456,257 2499.8,257 U3.41
  Bottom Layer w10: J6.5 2291,101 2380,101 2443,164 v1(2443,270)
GPIO46: J6.4 U3.44 | length 364.2
  Top Layer w10: J6.4 2391,101 2540,101 2555,116 2555,148.8 2600.2,194 U3.44
GPIO47: J6.23 U3.27 | length 2085
  Top Layer w10: J6.23 479,54 479,72 508,101 v1(686,101) ; U3.27 2142,366.54 2155.54,353 2204,353 2230,327 v1(2210,327)
  Bottom Layer w10: v1(686,101) 947.62,362.62 1320.53,362.62 1322.91,365 1410.91,365 1433.91,342 1778.74,342 1790,353.26 1927.16,353.26 1950.92,329.49 2134.49,329.49 2149,344 2193,344 v1(2210,327)
GPIO48: J6.22 U3.30 | length 2004.1
  Top Layer w10: v1(1906,427) 1837,358 1837,308 1850,295 1854.29,295 1913.29,236 2049.86,236 2080,266.14 U3.30
  Bottom Layer w10: J6.22 907.5,417.5 1518.68,417.5 1540.18,439 1651,439 1656,434 1698,434 1699.12,435.12 1897.88,435.12 v1(1906,427)
NetC5_1: C5.1 R9.2 U1.11 | length 181.5
  Top Layer w10: C5.1 533.07,634 506,634 506,577 553.02,577 566.02,590 R9.2
NetD4_2: D4.2 R5.1 | length 104.4
  Top Layer w10: D4.2 1818,249.4 1818,206.99 1830,194.99 R5.1
NetD8_2: D8.2 R15.1 | length 412.8
  Top Layer w10: D8.2 1780,826.4 1763,809.4 1763,650 1780,633 1810,633 1823,646 1823,760 1834.99,771.99 R15.1
NetJ1_A5: J1.A5 R4.2
NetJ1_B5: J1.B5 R70.2
NetJ3_A5: J3.A5 R13.2
NetJ3_B5: J3.B5 R12.2
NetQ1_1: Q1.1 R21.1 | length 79.7
  Top Layer w10: R21.1 1079,819.99 1103.41,844.4 Q1.1
NetQ2_1: Q2.1 R26.1 | length 80.4
  Top Layer w10: R26.1 1082,673.99 1103.41,695.4 Q2.1
NetR10_2: R10.2 U1.15
RTS_FTDI: Q1.2 R26.2 U1.19 | length 117.7
  Top Layer w10: R26.2 1057,746.6 1080,769.6 Q1.2
RXD_FTDI: R19.1 U1.1
TXD_FTDI: R20.2 U1.17
U0RXD: J6.6 R20.1 U3.40 | length 544
  Top Layer w10: J6.6 2177.53,54 2224.53,101 2357,101 2377,121 2444,121 2448,125 2513.01,125 2528.01,140 R20.1 2528.01,170 2504.01,194 2480,194 2466.34,207.66 U3.40
U0TXD: J6.7 R19.2 U3.39 | length 493.5
  Top Layer w10: J6.7 2078,54 2102,78 2102,80 2123,101 2311,101 2362,152 R19.2 2415.98,179 2432.87,195.89 U3.39
VBUS_SENSE: R11.1 R14.2 U1.16 | length 351
  Top Layer w10: R14.2 849.99,670 836,670 820,654 820,622 830,612 844,612 871,585 900,585 911.97,596.97 911.97,720 901.97,730 R11.1
pads on no net: J1.A8 J1.B8 J3.A8 J3.B8 J5.24 U1.2 U1.4 U1.5 U1.6 U1.7 U1.14